# Altium PCB Top.PcbDoc
Units mm, origin at the board's own origin, x right, y up, seen from the top; angles counter-clockwise.
Board outline 129.16 x 86.41 mm, 2 copper layers (Top Layer, Bottom Layer); 23 components, 19 nets, 112 pads, 12 vias.
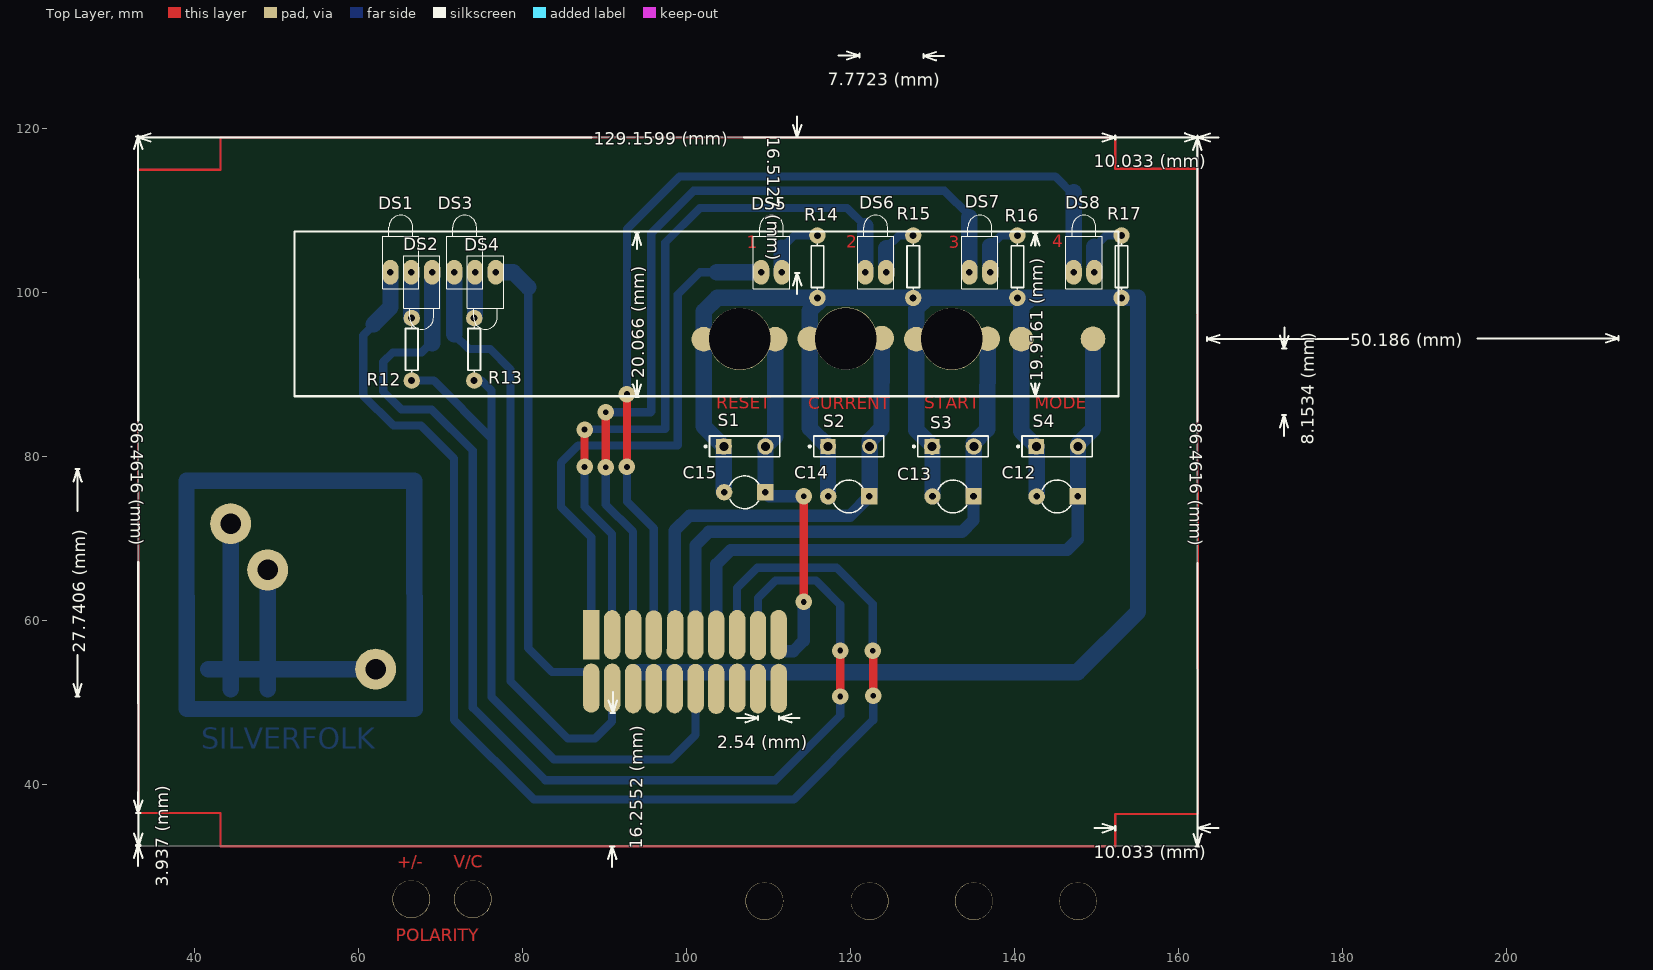
[diagram p0: Top Layer view]
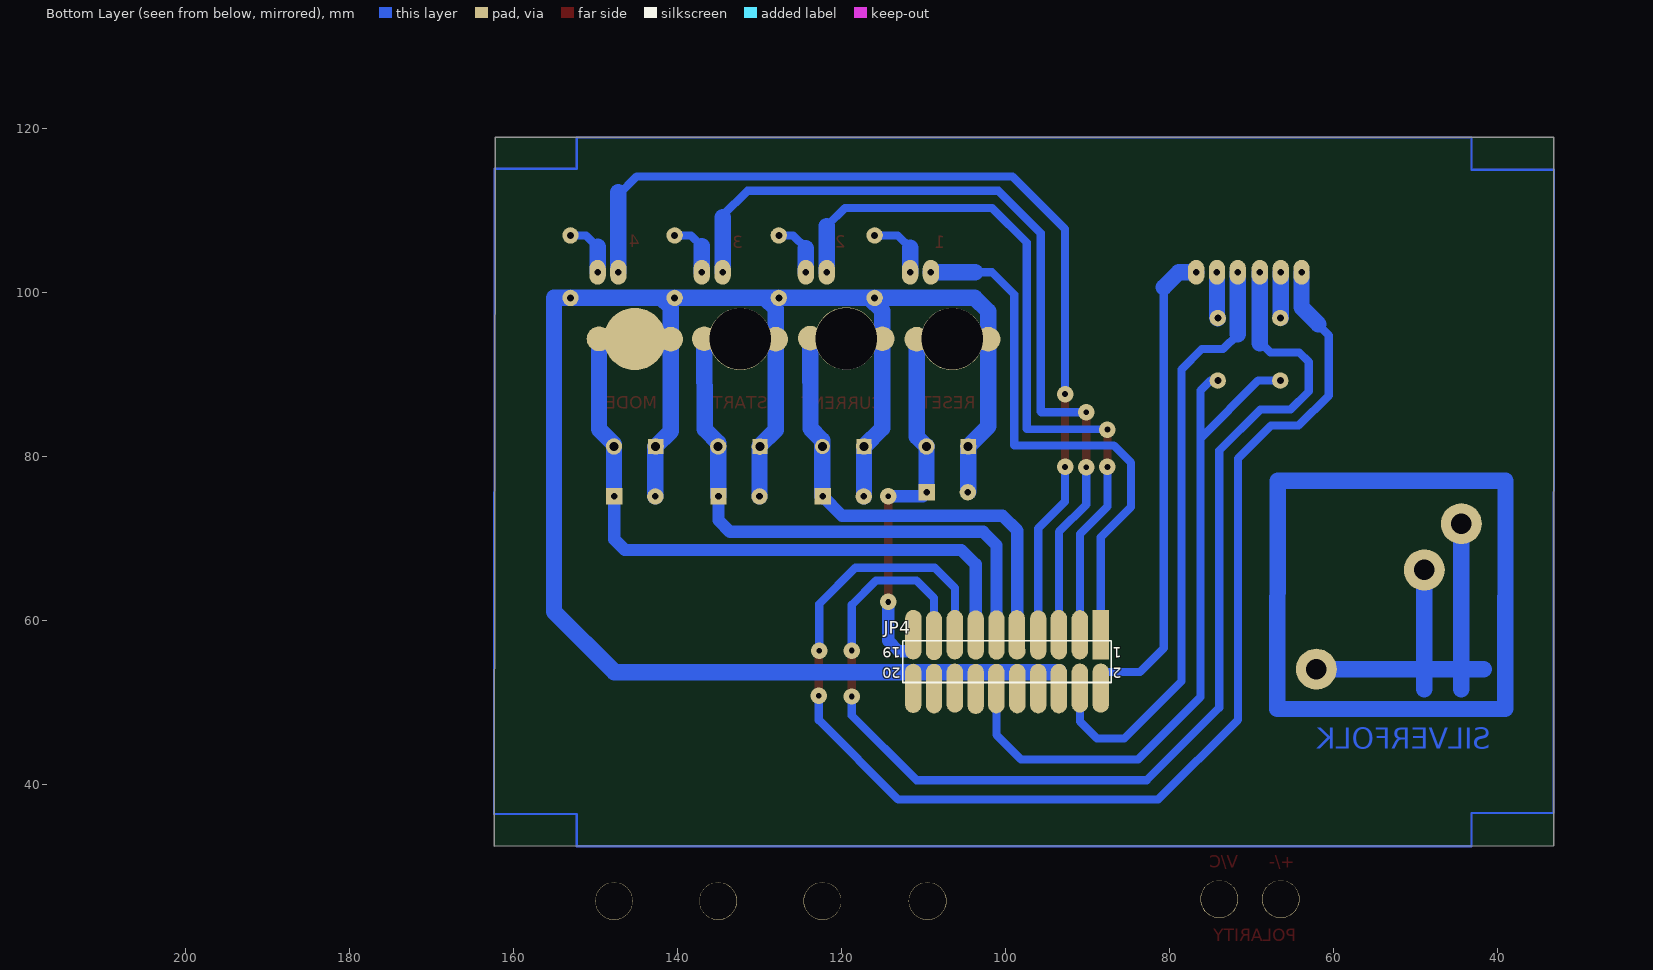
[diagram p1: Bottom Layer view, seen from below]

## Layer stack, top to bottom
Top Layer: signal copper 0.0356
Dielectric: dielectric 0.32, FR-4, Dk 4.8
Bottom Layer: signal copper 0.0356

## Board outline
33.172,32.512 162.306,32.461 162.179,118.872 33.147,118.872

## Design rules (kind name [scope] priority, off if disabled: settings)
Clearance [All] p1: gap=0.254
ComponentClearance [All] p1: gap=0.254 collisioncheckmode=0
PolygonConnect [All] p1: connectstyle=Relief reliefconductorwidth=0.254 reliefentries=4 polygonreliefangle="90 Angle"
RoutingLayers [All] p1: top layer_v5=FALSE bottom layer_v5=TRUE
RoutingVias [All] p1: holewidth=0.711 width=1.27 viastyle="Through Hole" minholewidth=0.711 minwidth=1.27 maxholewidth=0.711 maxwidth=2
SolderMaskExpansion [All] p1: expansion=0.102
TestPointUsage [All] p1: valid=0 allowmultiple=FALSE
Testpoint [All] p1: side=15 testpointundercomponent=TRUE minsize=1.016 maxsize=2.54 preferedsize=1.524 minholesize=0 maxholesize=1.016 preferedholesize=0.813 testpointgrid=0.025 style=1023 order=1234567890
Width [All] p1: maxlimit=2.5 minlimit=0.8 preferedwidth=1
16 further rules are at their usual default settings.

## Components (designator, comment, footprint, x,y, rotation, side; value= is the part's Value field where it differs from the comment)
C12 "Cap2" CAPR5-4X5 145.186,75.108 r180 top
C13 "Cap2" CAPR5-4X5 132.486,75.108 r180 top
C14 "Cap2" CAPR5-4X5 119.786,75.108 r180 top
C15 "Cap2" CAPR5-4X5 107.086,75.616 r180 top
DS1 "LED1" LED-1 65.176,102.438 r90 top
DS2 "LED2" LED-1 67.716,102.438 r270 top
DS3 "LED3" LED-1 72.949,102.438 r90 top
DS4 "LED4" LED-1 75.489,102.438 r270 top
DS5 "LED5" LED-1 110.363,102.438 r90 top
DS6 "LED6" LED-1 123.063,102.438 r90 top
DS7 "LED7" LED-1 135.763,102.438 r90 top
DS8 "LED8" LED-1 148.463,102.438 r90 top
JP4 "Header 10X2" HDR2X10 88.392,56.236 r0 bottom
R12 "Res1" AXIAL-0.3 66.497,93.04 r90 top
R13 "Res1" AXIAL-0.3 74.117,93.04 r90 top
R14 "Res1" AXIAL-0.3 115.951,103.124 r90 top
R15 "Res1" AXIAL-0.3 127.635,103.124 r90 top
R16 "Res1" AXIAL-0.3 140.335,103.124 r90 top
R17 "Res1" AXIAL-0.3 153.035,103.124 r90 top
S1 "SW-PB" SPST-2 107.088,81.204 r0 top
S2 "SW-PB" SPST-2 119.786,81.204 r0 top
S3 "SW-PB" SPST-2 132.486,81.204 r0 top
S4 "SW-PB" SPST-2 145.186,81.204 r0 top

## Footprints (in the part's own frame and the unit in brackets; to place one, negate y for a bottom-side part, rotate by r counter-clockwise, add the part's x,y. Pads: shape width x height; smd on the part's side, far side on the other; paste and mask are expansions set on the pad)
AXIAL-0.3 [mm]
  round 2 hole 0.85: 1(-3.81,0) 2(3.81,0)
  silkscreen extent -2.77,-0.76 2.77,0.76
CAPR5-4X5 [mm]
  rect 2x2 hole 0.8: 1(-2.5,0)
  round 2 hole 0.8: 2(2.5,0)
  silkscreen extent -1.69,-2 1.82,2
HDR2X10 [mm] "Connector; Header; 10x2 Position"
  rect 2x2 all layers, no hole: 1(0,0)
  round 2 all layers, no hole: 2(0,2.54) 3(2.54,0) 4(2.54,2.54) 5(5.08,0) 6(5.08,2.54) 7(7.62,0) 8(7.62,2.54) 9(10.16,0) 10(10.16,2.54) 11(12.7,0) 12(12.7,2.54) 13(15.24,0) 14(15.24,2.54) 15(17.78,0) 16(17.78,2.54) 17(20.32,0) 18(20.32,2.54) 19(22.86,0) 20(22.86,2.54)
  silkscreen extent -1.27,-1.27 24.13,3.81
LED-1 [mm]
  oval 3x2 hole 0.8: 1(0,1.27) 2(0,-1.27)
  silkscreen extent -2,-2.2 6.95,2.2
SPST-2 [mm]
  rect 1.85x1.85 hole 1.1: 1(-2.54,0)
  round 1.85 hole 1.1: 2(2.54,0)
  silkscreen extent -4.89,-1.27 4.28,1.27

## Part data
C12 C13 C14 C15: "Capacitor"
DS1: "Typical RED GaAs LED"
DS2 DS3 DS4 DS5 DS6 DS7 DS8: library part LED1, "Typical RED GaAs LED"
JP4: "Header, 10-Pin, Dual row"
R12 R13 R14 R15 R16 R17: "Resistor"
S1 S2 S3 S4: "Switch"

## Free pads (board coordinates)
  round 7.6 hole 7.5: 0(106.502,94.31) 0(119.431,94.361) 0(132.359,94.31)
  round 7.6 smd far side: 0(145.186,94.31)
  round 4.6 hole 4.5: 1(109.499,25.781) 1(122.326,25.781) 1(135.026,25.781) 1(147.726,25.781) 6(66.446,26.01) 6(73.939,26.01)
  round 5 hole 2.5: 2(44.425,71.78) 3(48.946,66.142) 4(62.103,54.051)
  round 2 hole 0.762: 12(104.546,81.204) 12(109.626,81.204) 12(117.246,81.204) 12(129.946,81.178) 12(135.026,81.204) 12(142.646,81.204) 12(147.726,81.204)
  round 3 all layers, no hole: 23(102.108,94.285) 23(110.82,94.285) 23(115.037,94.336) 23(123.8,94.412) 23(128.016,94.285) 23(136.728,94.336) 23(140.818,94.285) 23(149.555,94.31)
  oval 2x6 all layers, no hole: 24(111.227,58.293) 25(108.712,58.141) 26(106.172,58.268) 27(103.632,58.217) 28(101.092,58.217) 29(98.628,58.242) 30(96.012,58.217) 31(93.497,58.268) 32(90.932,58.242) 34(111.252,51.714) 35(108.712,51.664) 36(106.172,51.74) 37(103.632,51.587) 38(101.117,51.664) 39(98.552,51.664) 40(96.012,51.664) 41(93.497,51.664) 42(90.932,51.74) 43(88.392,51.74)
  rect 2x6 all layers, no hole: 33(88.392,58.293)

## Via types
v1: diameter 2, hole 0.711, Top Layer to Bottom Layer, 12 vias

## Nets (pads, with @x,y where several pads share a name; then routed paths per layer and width w, separated by ;. In a path a pad name is that pad's centre, name@x,y a point inside that pad or via, vN(x,y) a via of type N, cw(c..) or ccw(c..) an arc to the next point about the centre after c; other vN are vias at no path point)
GND: C12.2 C13.2 C14.2 C15.2 JP4.6 JP4.8 JP4.10 JP4.12 JP4.14 JP4.16 JP4.18 JP4.20 pad.12@104.546,81.204 pad.12@117.246,81.204 pad.12@129.946,81.178 pad.12@142.646,81.204 pad.23@102.108,94.285 pad.23@115.037,94.336 pad.23@128.016,94.285 pad.23@140.818,94.285 pad.34 pad.35 pad.36 pad.37 pad.38 pad.39 pad.40 pad.41 R12.1 R13.1 R14.1 R15.1 R16.1 R17.1 S1.1 S2.1 S3.1 S4.1 | length 362
  Bottom Layer w1: R12.1 69.19,89.23 76.225,82.194 ; R13.1 75.006,89.23 76.225,88.011 76.225,50.648 83.82,43.053 98.095,43.053 101.092,46.05 JP4.12 ; JP4.6 JP4.8 JP4.10 JP4.14 JP4.16 JP4.18 ; C15.2@104.546,75.656 C15.2 ; pad.12@129.946,81.178 S3.1 ; pad.12@129.946,81.28 S3.1 ; R16.1@140.335,98.755 R16.1 ; S4.1 pad.12@142.686,81.164 ; C14.2@117.246,75.148 C14.2 ; C14.2@117.246,75.148 C14.2 ; C14.2@117.246,75.148 C14.2 ; C14.2@117.246,75.148 C14.2 ; pad.12@129.934,81.191 S3.1 ; pad.12@129.934,81.191 S3.1 ; pad.12@129.934,81.191 S3.1 ; pad.12@129.934,81.191 S3.1 ; C13.2@129.946,75.148 C13.2 ; C13.2@129.946,75.148 C13.2 ; C13.2@129.946,75.148 C13.2 ; C13.2@129.946,75.148 C13.2
  Bottom Layer w2: JP4.6 147.676,53.696 155.042,61.062 155.042,99.314 103.734,99.314 102.108,97.688 102.108,83.642 104.546,81.204 C15.2@104.546,75.656 ; R14.1@116.586,99.314 115.037,97.765 115.037,94.336 115.037,83.414 S2.1 C14.2@117.246,75.148 ; 127.991,83.235 pad.23@127.991,94.031 ; 128.016,83.21 pad.12@129.946,81.28 ; pad.23@128.016,94.285 128.016,97.993 129.337,99.314 ; C13.2 pad.12@129.986,81.24 ; 141.961,99.314 140.818,98.171 140.818,94.285 140.818,83.033 142.686,81.164 C12.2
NetC12_1: C12.1 JP4.13 pad.12@147.726,81.204 pad.23@149.555,94.31 pad.27 S4.2 | length 81.6
  Bottom Layer w1: C12.1 C12.1@147.726,75.148 ; S4.2 147.726,81.458 S4.2
  Bottom Layer w1.5: JP4.13 103.632,66.827 105.385,68.58 146.406,68.58 147.686,69.861 C12.1
  Bottom Layer w2: C12.1@147.726,75.148 147.726,81.458 149.555,83.287 pad.23@149.555,94.31
NetC13_1: C13.1 JP4.11 pad.12@135.026,81.204 pad.23@136.728,94.336 pad.28 S3.2 | length 71.8
  Bottom Layer w1: C13.1 C13.1@135.026,75.148 ; S3.2 135.026,81.636 S3.2
  Bottom Layer w1.5: JP4.11 101.092,69.164 102.718,70.79 133.579,70.79 134.986,72.198 C13.1
  Bottom Layer w2: C13.1@135.026,75.148 135.026,81.636 136.677,83.287 pad.23@136.728,94.336
NetC14_1: C14.1 JP4.9 pad.23@123.8,94.412 pad.29 S2.2 | length 61.6
  Bottom Layer w1: S2.2 122.326,81.94 S2.2
  Bottom Layer w1.5: JP4.9 98.552,70.942 100.355,72.746 119.924,72.746 C14.1@122.326,75.148
  Bottom Layer w2: C14.1@122.326,75.148 122.326,81.94 123.774,83.388 pad.23@123.8,94.412
NetC15_1: C15.1 JP4.19 pad.12@109.626,81.204 pad.23@110.82,94.285 pad.24 S1.2 | length 45.3
  Top Layer w1: v1(114.3,62.255) v1(114.3,75.133)
  Bottom Layer w1.5: C15.1@109.626,75.656 C15.1 110.069,75.133 v1(114.3,75.133) ; JP4.19 113.005,56.236 114.3,57.531 v1(114.3,62.255)
  Bottom Layer w2: pad.12@109.586,81.164 110.82,82.398 pad.23@110.82,94.285 ; C15.1@109.626,75.656 pad.12@109.626,81.204
NetDS1_1: DS1.1 JP4.15 pad.26 | length 163
  Top Layer w1: v1(122.758,50.8) v1@122.758,56.337
  Bottom Layer w1: 61.849,96.114 61.849,96.012 60.579,94.742 60.579,87.427 64.262,83.744 67.64,83.744 71.653,79.731 71.653,47.879 81.382,38.151 113.081,38.151 122.758,47.828 v1(122.758,50.8) ; JP4.15 106.172,63.957 108.636,66.421 118.288,66.421 122.707,62.001 v1(122.707,56.286)
  Bottom Layer w2: 61.849,96.114 63.906,98.171 DS1.1
NetDS1_2: DS1.2 DS2.2 R12.2 | length 5.6
  Bottom Layer w1: R12.2@66.446,96.901 R12.2
  Bottom Layer w2: R12.2@66.446,96.901 DS2.2
NetDS2_1: DS2.1 JP4.17 pad.25 | length 148.2
  Top Layer w1: v1(118.745,50.724) v1(118.745,56.312)
  Bottom Layer w1: 68.986,93.802 68.859,93.802 67.716,92.659 64.186,92.659 63.017,91.491 63.017,87.935 65.227,85.725 68.936,85.725 73.939,80.721 73.939,49.352 82.779,40.513 110.846,40.513 118.745,48.412 v1(118.745,50.724) ; JP4.17 108.712,62.713 110.846,64.846 115.799,64.846 118.745,61.9 v1(118.745,56.312)
  Bottom Layer w2: 68.986,93.802 DS2.1
NetDS3_1: DS3.1 JP4.4 pad.42 | length 78.4
  Bottom Layer w1: 71.679,94.869 73.482,93.066 76.073,93.066 78.537,90.602 78.537,52.578 85.522,45.593 88.849,45.593 90.932,47.676 JP4.4 pad.42@90.907,53.67
  Bottom Layer w2: 71.679,94.869 DS3.1 71.679,100.457
NetDS3_2: DS3.2 DS4.2 R13.2 | length 5.6
  Bottom Layer w2: R13.2 74.219,96.952 DS4.2
NetDS4_1: DS4.1 JP4.2 pad.43 | length 57.6
  Bottom Layer w1: 80.696,100.609 80.696,56.617 83.617,53.696 JP4.2
  Bottom Layer w2: DS4.1 78.867,102.438 80.696,100.609
NetDS5_1: DS5.1 JP4.1 pad.33 | length 69.3
  Bottom Layer w1: JP4.1 88.392,70.129 84.684,73.838 84.684,79.223 86.792,81.331 98.908,81.331 98.933,81.356 98.933,99.72 101.651,102.438 103.708,102.438
  Bottom Layer w2: 103.708,102.438 DS5.1
NetDS5_2: DS5.2 R14.2 | length 7.9
  Bottom Layer w1: 111.633,105.435 113.132,106.934 R14.2
  Bottom Layer w2: DS5.2 111.633,105.435
NetDS6_1: DS6.1 JP4.3 pad.32 | length 93.6
  Top Layer w1: v1(87.579,78.715) v1(87.579,83.261)
  Bottom Layer w1: v1(87.579,78.715) 87.579,73.889 90.932,70.536 JP4.3 ; v1(87.579,83.261) 97.384,83.337 97.409,83.363 97.409,106.07 101.625,110.287 119.583,110.287 121.793,108.077
  Bottom Layer w2: DS6.1 121.793,108.077
NetDS6_2: DS6.2 R15.2 | length 6.9
  Bottom Layer w1: 124.333,105.385 125.882,106.934 R15.2
  Bottom Layer w2: DS6.2 124.333,105.385
NetDS7_1: DS7.1 JP4.5 pad.31 | length 107
  Top Layer w1: v1(90.145,78.664) v1(90.145,85.369)
  Bottom Layer w1: v1(90.145,78.664) 90.145,74.143 93.472,70.815 JP4.5 ; v1(90.145,85.369) 95.631,85.369 95.707,85.446 95.707,107.239 100.838,112.37 131.47,112.37 134.493,109.347 134.493,109.169
  Bottom Layer w2: DS7.1 134.493,109.169
NetDS7_2: DS7.2 R16.2 | length 7
  Bottom Layer w1: 137.033,105.639 138.328,106.934 R16.2
  Bottom Layer w2: DS7.2 137.033,105.639
NetDS8_1: DS8.1 JP4.7 pad.30 | length 120.6
  Top Layer w1: v1(92.735,78.715) v1(92.735,87.579)
  Bottom Layer w1: v1(92.735,78.715) 92.735,74.473 96.012,71.196 JP4.7 ; v1(92.735,87.579) 92.735,107.696 99.162,114.122 144.958,114.122 147.193,111.887
  Bottom Layer w2: DS8.1 147.193,112.217
NetDS8_2: DS8.2 R17.2 | length 7
  Bottom Layer w1: 149.733,105.537 151.13,106.934 R17.2
  Bottom Layer w2: DS8.2 149.733,105.537
copper on no net: | length 166.3
  Bottom Layer w2: 41.681,54.051 62.103,54.051 ; 44.425,51.613 44.425,71.78 ; 48.946,51.613 48.946,66.142 ; 39.04,77.013 39.065,49.225 66.853,49.2 66.827,77.013 39.04,77.013

## Other copper
Top Layer:
  text "4" at 144.602,105.512 h1.52
  text "2" at 119.482,105.41 h1.52
  text "1" at 107.315,105.359 h1.52
  text "3" at 131.953,105.359 h1.52
  text "RESET" at 103.607,85.776 h1.52
  text "START" at 129.007,85.776 h1.52
  text "MODE" at 142.443,85.776 h1.52
  text "CURRENT" at 114.833,85.725 h1.52
  text "+/-" at 64.745,29.82 h1.52
  text "V/C" at 71.653,29.82 h1.52
  text "POLARITY" at 64.567,20.879 h1.52
Bottom Layer:
  text "SILVERFOLK" at 40.843,44.348 h2.52
Multi-Layer:
  lines w0.254: 33.147,114.935 43.18,114.935 43.18,118.872 152.273,118.872 152.273,115.062 162.306,115.062 162.357,36.373 152.273,36.373 152.273,32.461 43.18,32.461 43.18,36.5 33.172,36.5 33.147,114.935

## Silkscreen, mask and mechanical layers (free items; w line width, h text height)
Top Overlay:
  lines w0.254: 25.247,52.218 25.754,50.694 ; 25.254,76.911 25.762,78.435 ; 25.5,50.694 26.008,50.694 ; 25.508,78.435 26.016,78.435 ; 25.756,55.779 25.754,50.694 ; 25.761,73.35 25.762,78.435 ; 26.263,52.218 25.754,50.694 ; 26.27,76.911 25.762,78.435 ; 32.639,31.064 33.147,32.588 ; 32.639,38.049 33.147,36.525 ; 32.639,117.45 33.147,118.974 ; 32.663,34.036 33.172,32.512 ; 32.893,32.588 33.401,32.588 ; 32.893,36.525 33.401,36.525 ; 32.893,118.974 33.401,118.974 ; 32.918,32.512 33.426,32.512 ; 33.147,30.048 33.147,32.588 ; 33.147,39.065 33.147,36.525 ; 33.147,118.618 33.147,119.126 ; 33.157,84.402 33.147,118.974 ; 33.162,67.084 33.172,32.512 ; 33.655,31.064 33.147,32.588 ; 33.655,38.049 33.147,36.525 ; 33.655,117.45 33.147,118.974 ; 33.679,34.036 33.172,32.512 ; 34.671,118.364 33.147,118.872 ; 34.671,119.38 33.147,118.872 ; 88.433,118.873 33.147,118.872 ; 90.419,30.929 90.934,32.451 ; 90.51,50.232 91.011,48.706 ; 90.68,32.452 91.188,32.449 ; 90.757,48.707 91.265,48.704 ; 90.922,29.911 90.934,32.451 ; 91.022,51.246 91.011,48.706 ; 91.435,30.924 90.934,32.451 ; 91.526,50.227 91.011,48.706 ; 93.447,88.775 93.955,87.251 ; 93.447,105.793 93.955,107.317 ; 93.701,87.251 94.209,87.251 ; 93.701,107.317 94.209,107.317 ; 93.955,89.261 93.955,87.251 ; 93.955,105.308 93.955,107.317 ; 94.463,88.775 93.955,87.251 ; 94.463,105.793 93.955,107.317 ; 106.172,48.082 108.712,48.082 ; 107.02,118.873 162.307,118.875 ; 107.188,47.574 108.712,48.082 ; 107.188,48.59 108.712,48.082 ; 108.712,47.828 108.712,48.336 ; 111.252,47.828 111.252,48.336 ; 112.776,47.574 111.252,48.082 ; 112.776,48.59 111.252,48.082 ; 112.979,120.396 113.487,118.872 ; 112.98,100.835 113.488,102.359 ; 113.233,118.872 113.741,118.872 ; 113.234,102.359 113.742,102.359 ; 113.487,121.412 113.487,118.872 ; 113.488,99.819 113.488,102.359 ; 113.792,48.082 111.252,48.082 ; 113.995,120.396 113.487,118.872 ; 113.996,100.835 113.488,102.359 ; 118.563,128.87 121.103,128.853 ; 119.576,128.355 121.103,128.853 ; 119.583,129.371 121.103,128.853 ; 121.102,128.599 121.105,129.107 ; 128.874,128.548 128.877,129.056 ; 130.396,128.284 128.875,128.802 ; 130.403,129.3 128.875,128.802 ; 131.415,128.786 128.875,128.802 ; 142.011,88.849 142.519,87.325 ; 142.011,105.717 142.519,107.241 ; 142.265,87.325 142.773,87.325 ; 142.265,107.241 142.773,107.241 ; 142.519,88.878 142.519,87.325 ; 142.519,105.688 142.519,107.241 ; 143.027,88.849 142.519,87.325 ; 143.027,105.717 142.519,107.241 ; 149.733,34.671 152.273,34.671 ; 149.733,118.872 152.273,118.872 ; 150.749,34.163 152.273,34.671 ; 150.749,35.179 152.273,34.671 ; 150.749,118.364 152.273,118.872 ; 150.749,119.38 152.273,118.872 ; 152.273,34.417 152.273,34.925 ; 152.273,118.618 152.273,119.126 ; 160.783,118.366 162.307,118.875 ; 160.783,119.382 162.307,118.875 ; 161.773,117.373 162.28,118.897 ; 161.797,33.959 162.306,32.436 ; 162.026,118.897 162.534,118.897 ; 162.052,32.436 162.56,32.436 ; 162.29,84.325 162.28,118.897 ; 162.295,67.008 162.306,32.436 ; 162.306,34.417 162.306,34.925 ; 162.306,118.618 162.306,119.126 ; 162.307,118.621 162.307,119.129 ; 162.789,117.373 162.28,118.897 ; 162.813,33.96 162.306,32.436 ; 163.454,94.551 163.455,94.043 ; 163.83,34.163 162.306,34.671 ; 163.83,35.179 162.306,34.671 ; 163.83,118.364 162.306,118.872 ; 163.83,119.38 162.306,118.872 ; 164.846,34.671 162.306,34.671 ; 164.846,118.872 162.306,118.872 ; 164.977,94.808 163.454,94.297 ; 164.979,93.792 163.454,94.297 ; 172.334,83.492 172.847,85.015 ; 172.368,94.693 172.872,93.168 ; 172.593,85.015 173.101,85.014 ; 172.618,93.169 173.126,93.167 ; 172.839,82.475 172.847,85.015 ; 172.879,95.708 172.872,93.168 ; 173.35,83.489 172.847,85.015 ; 173.384,94.69 172.872,93.168 ; 180.65,94.329 163.454,94.297 ; 196.444,94.358 213.64,94.389 ; 212.115,94.894 213.64,94.389 ; 212.117,93.878 213.64,94.389 ; 213.64,94.643 213.641,94.135 ; 52.222,87.325 52.222,107.391 152.679,107.391 152.679,87.325 52.222,87.325
  text "7.7723 (mm)" at 117.196,125.222 h1.52 r359.63
  text "16.5127 (mm)" at 109.831,118.893 h1.52 r270
  text "129.1599 (mm)" at 88.687,117.959 h1.52
  text "10.033 (mm)" at 149.647,115.215 h1.52
  text "50.186 (mm)" at 180.906,93.415 h1.52 r0.11
  text "20.066 (mm)" at 94.869,89.515 h1.52 r90
  text "19.9161 (mm)" at 143.434,89.132 h1.52 r90
  text "86.4616 (mm)" at 32.243,84.147 h1.52 r270.02
  text "86.4616 (mm)" at 161.376,84.071 h1.52 r270.02
  text "8.1534 (mm)" at 176.493,81.437 h1.52 r89.83
  text "27.7406 (mm)" at 26.67,56.032 h1.52 r89.98
  text "2.54 (mm)" at 103.736,44.426 h1.52
  text "16.2552 (mm)" at 94.59,32.156 h1.52 r89.73
  text "10.033 (mm)" at 149.647,31.014 h1.52
  text "3.937 (mm)" at 36.804,27.549 h1.52 r90

## Text inside footprints (layer, text, board x,y; h text height)
JP4: Bottom Overlay "2" at 85.852,54.204 h1.27 r180; Bottom Overlay "1" at 85.852,56.744 h1.27 r180; Bottom Overlay "19" at 112.776,56.744 h1.27 r180; Bottom Overlay "20" at 112.776,54.204 h1.27 r180